# EAGLE board Circuit for the 3-DoF Robotic Arm with ultrasonic sensors (EAGLE 9.7.0)

Size 194.21 x 166.16 mm. Coordinates in mm from the lower left corner, seen from the top.
Outline: 0,0 194.21,0 194.21,166.16 0,166.16 0,0
Copper layers (1*16): Top 0.035mm / dielectric 1.5mm / Bottom 0.035mm
Design rules "default": minimum track width 6mil, minimum drill 0.35mm, track to track 6mil, track to pad 6mil, pad to pad 6mil, via to via 6mil, smd to smd 6mil, copper to edge 40mil, drill to drill 6mil, minimum pad ring 10mil, minimum via ring 8mil, stop-mask expansion 4mil, vias tented up to drill 0mil, thermal gap 10mil

## Footprints (pad centres in the part's own frame; a part is rotated, then mirrored left to right if it is on the bottom)
MOTOR = drill 1.118 pad 3.15 octagon: + 2.54,0; - -2.54,0
28015 = drill 1.016 long: 1 -2.54,0; 2 0,0; 3 2.54,0
RESAD1016W63L850D250B = drill 0.83 pad 1.43: 1 -5.08,0; 2 5.08,0
SWITCH-SPDT-PTH-8.5X3.7MM = drill 1.016 pad 1.88: 1 -2.54,0; 2 0,0; 3 2.54,0
ARDUINO-UNO-R3-SHIELD = drill 1.016 pad 1.88: 3.3V 24.13,-2.54; 5V 24.13,0; A0 24.13,12.7; A1 24.13,15.24; A2 24.13,17.78; A3 24.13,20.32; A4 24.13,22.86; A5 24.13,25.4; AREF -24.13,-13.97; D2 -24.13,20.32; D3 -24.13,17.78; D4 -24.13,15.24; D5 -24.13,12.7; D6 -24.13,10.16; D7 -24.13,7.62; D8 -24.13,3.81; D9 -24.13,1.27; D10 -24.13,-1.27; D11 -24.13,-3.81; D12 -24.13,-6.35; D13 -24.13,-8.89; GND@0 24.13,2.54; GND@1 24.13,5.08; GND@2 -24.13,-11.43; IOREF 24.13,-7.62; NC 24.13,-10.16; RES 24.13,-5.08; RX -24.13,25.4; SCL -24.13,-19.05; SDA -24.13,-16.51; TX -24.13,22.86; VIN 24.13,7.62
DIP762W53P254L1969H508Q16B = drill 0.743 pad 1.343: 1 -3.81,8.89; 2 -3.81,6.35; 3 -3.81,3.81; 4 -3.81,1.27; 5 -3.81,-1.27; 6 -3.81,-3.81; 7 -3.81,-6.35; 8 -3.81,-8.89; 9 3.81,-8.89; 10 3.81,-6.35; 11 3.81,-3.81; 12 3.81,-1.27; 13 3.81,1.27; 14 3.81,3.81; 15 3.81,6.35; 16 3.81,8.89

## Placement (x,y rotation side)
MARMMOTOR  MOTOR_HDR  [MOTOR]  156.09,83.63 0 top
MBASEMOTOR  MOTOR_HDR  [MOTOR]  185.96,70.26 0 top
MCLAWMOTOR  MOTOR_HDR  [MOTOR]  126.17,94.67 0 top
PINGLEFT_SENSOR_ON_THE_ARM_NEAR_THE_CLAW_(AFFECTS_BASE_ROTATION))  DISTANCE-SENSOR-3PIN  [28015]  111.45,138.64 90 top
PINGRIGHT_SENSOR_ON_THE_ARM_NEAR_THE_CLAW_(AFFECTS_BASE_ROTATION))  DISTANCE-SENSOR-3PIN  [28015]  172.48,140.13 270 top
PINGSENSOR_ON_THE_TOP_OF_THE_ARM_NEAR_THE_CLAW  DISTANCE-SENSOR-3PIN  [28015]  141.3,142.29 0 top
R1  1k  [RESAD1016W63L850D250B]  10.6,61.26 90 top
R2  1k  [RESAD1016W63L850D250B]  14,61.26 90 top
R3  1k  [RESAD1016W63L850D250B]  17.62,61.15 90 top
R4  1k  [RESAD1016W63L850D250B]  21.22,60.98 90 top
R5  1k  [RESAD1016W63L850D250B]  24.9,60.89 90 top
R6  1k  [RESAD1016W63L850D250B]  28.37,60.88 90 top
SSWITCH1POWER-FORBASEMOTOR  TOGGLE  [SWITCH-SPDT-PTH-8.5X3.7MM]  70.99,76.74 0 top
SSWITCH1ROTATION-FORBASEMOTOR  TOGGLE  [SWITCH-SPDT-PTH-8.5X3.7MM]  58.64,76.83 0 top
SSWITCH2POWER-FORARMMOTOR  TOGGLE  [SWITCH-SPDT-PTH-8.5X3.7MM]  70.82,85.02 0 top
SSWITCH2ROTATION-FORARMMOTOR  TOGGLE  [SWITCH-SPDT-PTH-8.5X3.7MM]  58.48,85.08 0 top
SSWITCH3POWER-FORCLAWMOTOR  TOGGLE  [SWITCH-SPDT-PTH-8.5X3.7MM]  70.94,92.73 0 top
SSWITCH3ROTATION-FORCLAWMOTOR  TOGGLE  [SWITCH-SPDT-PTH-8.5X3.7MM]  58.54,92.81 0 top
U1  ARDUINO-UNO-R3-SHIELD  [ARDUINO-UNO-R3-SHIELD]  47.88,29.84 270 top
U2  L293E  [DIP762W53P254L1969H508Q16B]  138.37,33.51 90 top
U3  L293E  [DIP762W53P254L1969H508Q16B]  168.85,33.51 90 top

## Library data of the parts
MARMMOTOR MBASEMOTOR MCLAWMOTOR PINGLEFT_SENSOR_ON_THE_ARM_NEAR_THE_CLAW_(AFFECTS_BASE_ROTATION)) PINGRIGHT_SENSOR_ON_THE_ARM_NEAR_THE_CLAW_(AFFECTS_BASE_ROTATION)) PINGSENSOR_ON_THE_TOP_OF_THE_ARM_NEAR_THE_CLAW R1-R6 SSWITCH1POWER-FORBASEMOTOR SSWITCH1ROTATION-FORBASEMOTOR SSWITCH2POWER-FORARMMOTOR SSWITCH2ROTATION-FORARMMOTOR SSWITCH3POWER-FORCLAWMOTOR SSWITCH3ROTATION-FORCLAWMOTOR U1-U3 = Tinkercad

## Nets
MARMMOTOR_+: MARMMOTOR.+ U2.11
MARMMOTOR_-: MARMMOTOR.- U2.14
MBASEMOTOR_+: MBASEMOTOR.+ U3.11
MBASEMOTOR_-: MBASEMOTOR.- U3.14
MCLAWMOTOR_+: MCLAWMOTOR.+ U2.6
MCLAWMOTOR_-: MCLAWMOTOR.- U2.3
SSWITCH1POWER-FORBASEMOTOR_O: SSWITCH1POWER-FORBASEMOTOR.1 SSWITCH1ROTATION-FORBASEMOTOR.2
SSWITCH2POWER-FORARMMOTOR_O: SSWITCH2POWER-FORARMMOTOR.1 SSWITCH2ROTATION-FORARMMOTOR.2
SSWITCH3POWER-FORCLAWMOTOR_O: SSWITCH3POWER-FORCLAWMOTOR.1 SSWITCH3ROTATION-FORCLAWMOTOR.2
U1_5V: PINGLEFT_SENSOR_ON_THE_ARM_NEAR_THE_CLAW_(AFFECTS_BASE_ROTATION)).2 PINGRIGHT_SENSOR_ON_THE_ARM_NEAR_THE_CLAW_(AFFECTS_BASE_ROTATION)).2 PINGSENSOR_ON_THE_TOP_OF_THE_ARM_NEAR_THE_CLAW.2 SSWITCH1POWER-FORBASEMOTOR.2 SSWITCH2POWER-FORARMMOTOR.2 SSWITCH3POWER-FORCLAWMOTOR.2 U1.5V U2.1 U2.8 U2.9 U2.16 U3.1 U3.8 U3.9 U3.16
U1_A0: PINGLEFT_SENSOR_ON_THE_ARM_NEAR_THE_CLAW_(AFFECTS_BASE_ROTATION)).3 U1.A0
U1_A1: PINGRIGHT_SENSOR_ON_THE_ARM_NEAR_THE_CLAW_(AFFECTS_BASE_ROTATION)).3 U1.A1
U1_A2: PINGSENSOR_ON_THE_TOP_OF_THE_ARM_NEAR_THE_CLAW.3 U1.A2
U1_D2: R6.2 SSWITCH3ROTATION-FORCLAWMOTOR.3 U1.D2
U1_D3: R5.2 SSWITCH3ROTATION-FORCLAWMOTOR.1 U1.D3
U1_D4: R4.2 SSWITCH2ROTATION-FORARMMOTOR.3 U1.D4
U1_D5: R3.2 SSWITCH2ROTATION-FORARMMOTOR.1 U1.D5
U1_D6: R2.2 SSWITCH1ROTATION-FORBASEMOTOR.3 U1.D6
U1_D7: R1.2 SSWITCH1ROTATION-FORBASEMOTOR.1 U1.D7
U1_D8: U1.D8 U2.2
U1_D9: U1.D9 U2.7
U1_D10: U1.D10 U2.15
U1_D11: U1.D11 U2.10
U1_D12: U1.D12 U3.15
U1_D13: U1.D13 U3.10
U1_GND: PINGLEFT_SENSOR_ON_THE_ARM_NEAR_THE_CLAW_(AFFECTS_BASE_ROTATION)).1 PINGRIGHT_SENSOR_ON_THE_ARM_NEAR_THE_CLAW_(AFFECTS_BASE_ROTATION)).1 PINGSENSOR_ON_THE_TOP_OF_THE_ARM_NEAR_THE_CLAW.1 R1.1 R2.1 R3.1 R4.1 R5.1 R6.1 U1.GND@0 U1.GND@1 U1.GND@2 U2.4 U2.5 U2.12 U2.13 U3.4 U3.5 U3.12 U3.13

## Tracks (layer width: path | path; a pad name or v marks a point on that pad's centre or on a via)
MARMMOTOR_+  (1 unrouted)
MARMMOTOR_-  (1 unrouted)
MBASEMOTOR_+  (1 unrouted)
MBASEMOTOR_-  (1 unrouted)
MCLAWMOTOR_+  (1 unrouted)
MCLAWMOTOR_-  (1 unrouted)
SSWITCH1POWER-FORBASEMOTOR_O  (1 unrouted)
SSWITCH2POWER-FORARMMOTOR_O  (1 unrouted)
SSWITCH3POWER-FORCLAWMOTOR_O  (1 unrouted)
U1_5V  (14 unrouted)
U1_A0  (1 unrouted)
U1_A1  (1 unrouted)
U1_A2  (1 unrouted)
U1_D2  (2 unrouted)
U1_D3  (2 unrouted)
U1_D4  (2 unrouted)
U1_D5  (2 unrouted)
U1_D6  (2 unrouted)
U1_D7  (2 unrouted)
U1_D8  (1 unrouted)
U1_D9  (1 unrouted)
U1_D10  (1 unrouted)
U1_D11  (1 unrouted)
U1_D12  (1 unrouted)
U1_D13  (1 unrouted)
U1_GND  (19 unrouted)